# EAGLE board 23128Adapter_v1.1 (EAGLE 7.7.0)
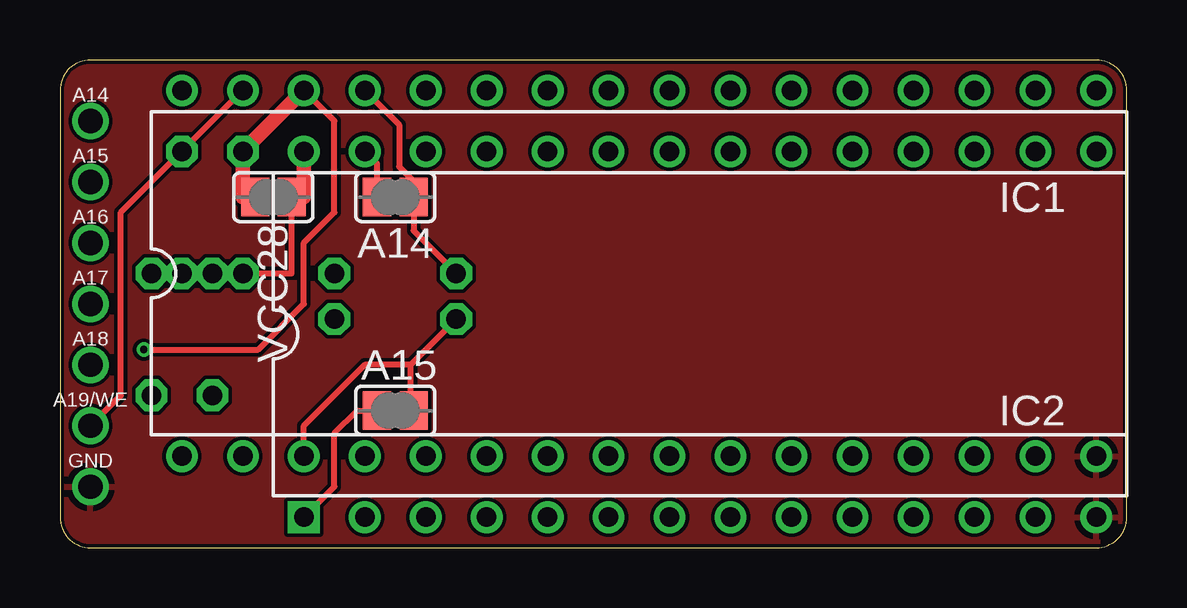
[diagram p0: board, top side]
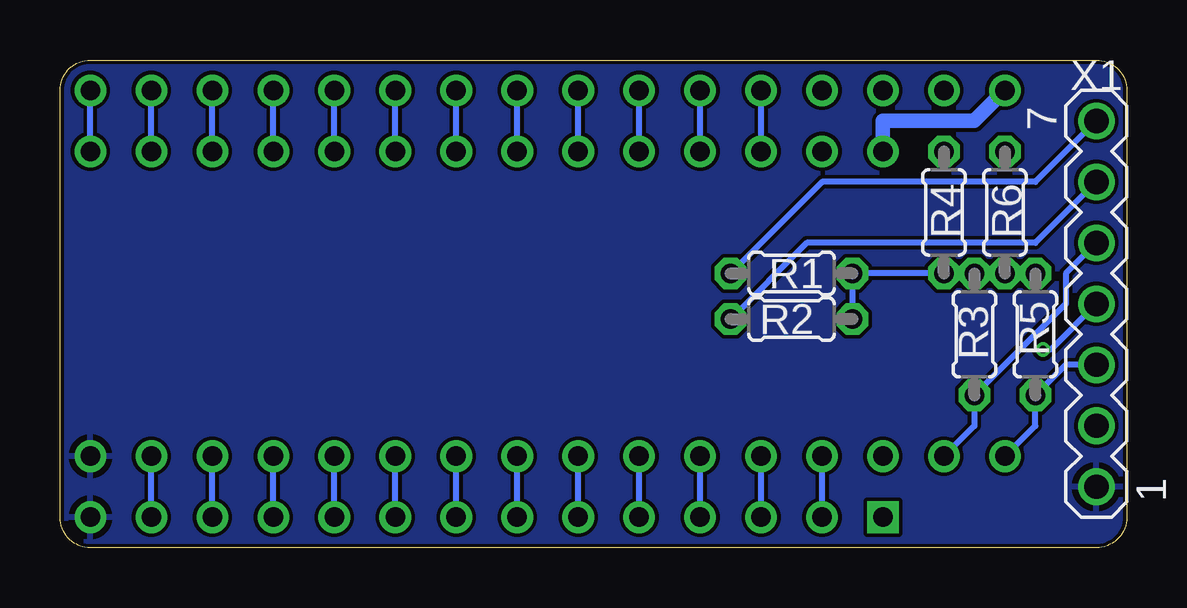
[diagram p1: board, bottom side, seen from below]

Size 44.45 x 20.32 mm. Coordinates in mm from the lower left corner, seen from the top.
Outline: 0,19.05 0,1.27 arc90 1.27,0 43.18,0 arc90 44.45,1.27 44.45,19.05 arc90 43.18,20.32 1.27,20.32 arc90 0,19.05
Copper layers (1*16): Top 0.035mm / dielectric 1.5mm / Bottom 0.035mm
Design rules "hackvana *": minimum track width 6mil, minimum drill 0.3mm, track to track 6mil, track to pad 6mil, pad to pad 6mil, via to via 6mil, smd to smd 0mil, copper to edge 6mil, drill to drill 6mil, minimum pad ring 10mil, minimum via ring 6mil, stop-mask expansion 2mil, vias tented up to drill 100mil, thermal gap 10mil

## Footprints (pad centres in the part's own frame; a part is rotated, then mirrored left to right if it is on the bottom)
SJ = smd 1.168 x 1.6: 1 -0.762,0; 2 0.762,0
DIL32-6ROUNDPAD = drill 0.813: 1 -19.05,-7.62; 2 -16.51,-7.62; 3 -13.97,-7.62; 4 -11.43,-7.62; 5 -8.89,-7.62; 6 -6.35,-7.62; 7 -3.81,-7.62; 8 -1.27,-7.62; 9 1.27,-7.62; 10 3.81,-7.62; 11 6.35,-7.62; 12 8.89,-7.62; 13 11.43,-7.62; 14 13.97,-7.62; 15 16.51,-7.62; 16 19.05,-7.62; 17 19.05,7.62; 18 16.51,7.62; 19 13.97,7.62; 20 11.43,7.62; 21 8.89,7.62; 22 6.35,7.62; 23 3.81,7.62; 24 1.27,7.62; 25 -1.27,7.62; 26 -3.81,7.62; 27 -6.35,7.62; 28 -8.89,7.62; 29 -11.43,7.62; 30 -13.97,7.62; 31 -16.51,7.62; 32 -19.05,7.62
DIL28-ROUNDPAD = drill 0.813 square: 1 -16.51,-7.62 | drill 0.813: 2 -13.97,-7.62; 3 -11.43,-7.62; 4 -8.89,-7.62; 5 -6.35,-7.62; 6 -3.81,-7.62; 7 -1.27,-7.62; 8 1.27,-7.62; 9 3.81,-7.62; 10 6.35,-7.62; 11 8.89,-7.62; 12 11.43,-7.62; 13 13.97,-7.62; 14 16.51,-7.62; 15 16.51,7.62; 16 13.97,7.62; 17 11.43,7.62; 18 8.89,7.62; 19 6.35,7.62; 20 3.81,7.62; 21 1.27,7.62; 22 -1.27,7.62; 23 -3.81,7.62; 24 -6.35,7.62; 25 -8.89,7.62; 26 -11.43,7.62; 27 -13.97,7.62; 28 -16.51,7.62
0204/5 = drill 0.813 octagon: 1 -2.54,0; 2 2.54,0
MA07-1 = drill 1.016: 1 -7.62,0; 2 -5.08,0; 3 -2.54,0; 4 0,0; 5 2.54,0; 6 5.08,0; 7 7.62,0

## Placement (x,y rotation side)
A14  [SJ]  13.97,14.61 180 top
A15  [SJ]  13.97,5.71 180 top
IC1  EPROM  [DIL32-6ROUNDPAD]  24.13,11.43 0 top
IC2  23128  [DIL28-ROUNDPAD]  26.67,8.89 0 top
R1  [0204/5]  13.97,11.43 0 bottom
R2  [0204/5]  13.97,9.53 0 bottom
R3  [0204/5]  6.35,8.89 90 bottom
R4  [0204/5]  7.62,13.97 270 bottom
R5  [0204/5]  3.81,8.89 90 bottom
R6  [0204/5]  5.08,13.97 270 bottom
VCC28  [SJ]  8.89,14.61 0 top
X1  [MA07-1]  1.27,10.16 90 bottom

## Library data of the parts
A14 A15 VCC28 = jumper
IC1 = 0RB_Memory
IC2 = commodore
R1-R6 = resistor
X1 = con-lstb-rp; OC_FARNELL: unknown; OC_NEWARK: unknown

## Nets
!CE: IC1.22 IC2.20
!OE: IC1.24 IC2.22
!WE: IC1.31 R6.1 X1.2
A0: IC1.12 IC2.10
A1: IC1.11 IC2.9
A2: IC1.10 IC2.8
A3: IC1.9 IC2.7
A4: IC1.8 IC2.6
A5: IC1.7 IC2.5
A6: IC1.6 IC2.4
A7: IC1.5 IC2.3
A8: IC1.27 IC2.25
A9: IC1.26 IC2.24
A10: IC1.23 IC2.21
A11: IC1.25 IC2.23
A12: IC1.4 IC2.2
A13: IC1.28 IC2.26
A14: A14.1 IC1.29 R1.1 X1.7
A15: A15.1 IC1.3 R2.1 X1.6
A16: IC1.2 R3.1 X1.5
A17: IC1.30 R4.1 VCC28.1 X1.4
A18: IC1.1 R5.1 X1.3
D0: IC1.13 IC2.11
D1: IC1.14 IC2.12
D2: IC1.15 IC2.13
D3: IC1.17 IC2.15
D4: IC1.18 IC2.16
D5: IC1.19 IC2.17
D6: IC1.20 IC2.18
D7: IC1.21 IC2.19
GND: IC1.16 IC2.14 X1.1
N$1: A14.2 IC2.27
N$2: A15.2 IC2.1
VCC: IC1.32 IC2.28 R1.2 R2.2 R3.2 R4.2 R5.2 R6.2 VCC28.2

## Tracks (layer width: path | path; a pad name or v marks a point on that pad's centre or on a via)
!CE
  Bottom 0.254: IC2.20 IC1.22
!OE
  Bottom 0.254: IC2.22 IC1.24
!WE
  Top 0.254: X1.2 2.54,6.35 2.54,13.97 R6.1 IC1.31
A0
  Bottom 0.254: IC2.10 IC1.12
A1
  Bottom 0.254: IC2.9 IC1.11
A2
  Bottom 0.254: IC2.8 IC1.10
A3
  Bottom 0.254: IC2.7 IC1.9
A4
  Bottom 0.254: IC2.6 IC1.8
A5
  Bottom 0.254: IC2.5 IC1.7
A6
  Bottom 0.254: IC2.4 IC1.6
A7
  Bottom 0.254: IC2.3 IC1.5
A8
  Bottom 0.254: IC2.25 IC1.27
A9
  Bottom 0.254: IC2.24 IC1.26
A10
  Bottom 0.254: IC2.21 IC1.23
A11
  Bottom 0.254: IC2.23 IC1.25
A12
  Bottom 0.254: IC2.2 IC1.4
A13
  Bottom 0.254: IC2.26 IC1.28
A14
  Top 0.254: R1.1 14.73,13.21 A14.1 14.73,15.27 14.13,15.88 14.13,17.62 IC1.29
  Bottom 0.254: X1.7 3.81,15.24 12.7,15.24 R1.1
A15
  Top 0.254: IC1.3 10.16,5.08 12.7,7.62 14.61,7.62 | A15.1 14.61,5.84 14.61,7.62 | R2.1 14.61,7.62
  Bottom 0.254: X1.6 3.81,12.7 13.34,12.7 R2.1
A16
  Bottom 0.254: IC1.2 6.35,5.08 R3.1 2.54,10.16 2.54,11.43 X1.5
A17  (via drill 0.3)
  Top 0.254: v3.49,8.26 8.26,8.26 10.16,10.16 10.16,12.7 11.43,13.97 11.43,17.78 IC1.30
  Top 0.61: VCC28.1 7.62,14.61 R4.1 IC1.30
  Bottom 0.254: X1.4 3.17,8.26 v3.49,8.26
A18
  Bottom 0.254: IC1.1 3.81,5.08 R5.1 2.54,7.62 X1.3
D0
  Bottom 0.254: IC2.11 IC1.13
D1
  Bottom 0.254: IC2.12 IC1.14
D2
  Bottom 0.254: IC2.13 IC1.15
D3
  Bottom 0.254: IC2.15 IC1.17
D4
  Bottom 0.254: IC2.16 IC1.18
D5
  Bottom 0.254: IC2.17 IC1.19
D6
  Bottom 0.254: IC2.18 IC1.20
D7
  Bottom 0.254: IC2.19 IC1.21
GND
  pour Top: 43.18,0 1.27,0 arc-90 0,1.27 0,19.05 arc-90 1.27,20.32 43.18,20.32 arc-90 44.45,19.05 44.45,1.27 arc-90
  pour Bottom: 43.18,0 1.27,0 arc-90 0,1.27 0,19.05 arc-90 1.27,20.32 43.18,20.32 arc-90 44.45,19.05 44.45,1.27 arc-90
N$1
  Top 0.254: IC2.27 13.21,16 A14.2
N$2
  Top 0.254: IC2.1 11.43,2.54 11.43,4.76 12.38,5.71 A15.2
VCC
  Top 0.254: R4.2 9.65,11.43 VCC28.2
  Top 0.61: IC2.28 10.16,14.61 VCC28.2
  Bottom 0.254: R5.2 R6.2 R4.2 | R4.2 R3.2 | R2.2 R1.2 R4.2
  Bottom 0.61: IC2.28 10.16,17.78 6.35,17.78 IC1.32

## Text on the board
tNames: A14 | A15 | A16 | A17 | A18 | A19/WE | GND
tValues: (c) 2014 RETRO Innovations | www.go4retro.com